# EAGLE board Waveshapers v2.2 for voice board v1.1.1 - v1.0 (EAGLE 9.6.2), part 1 of 2
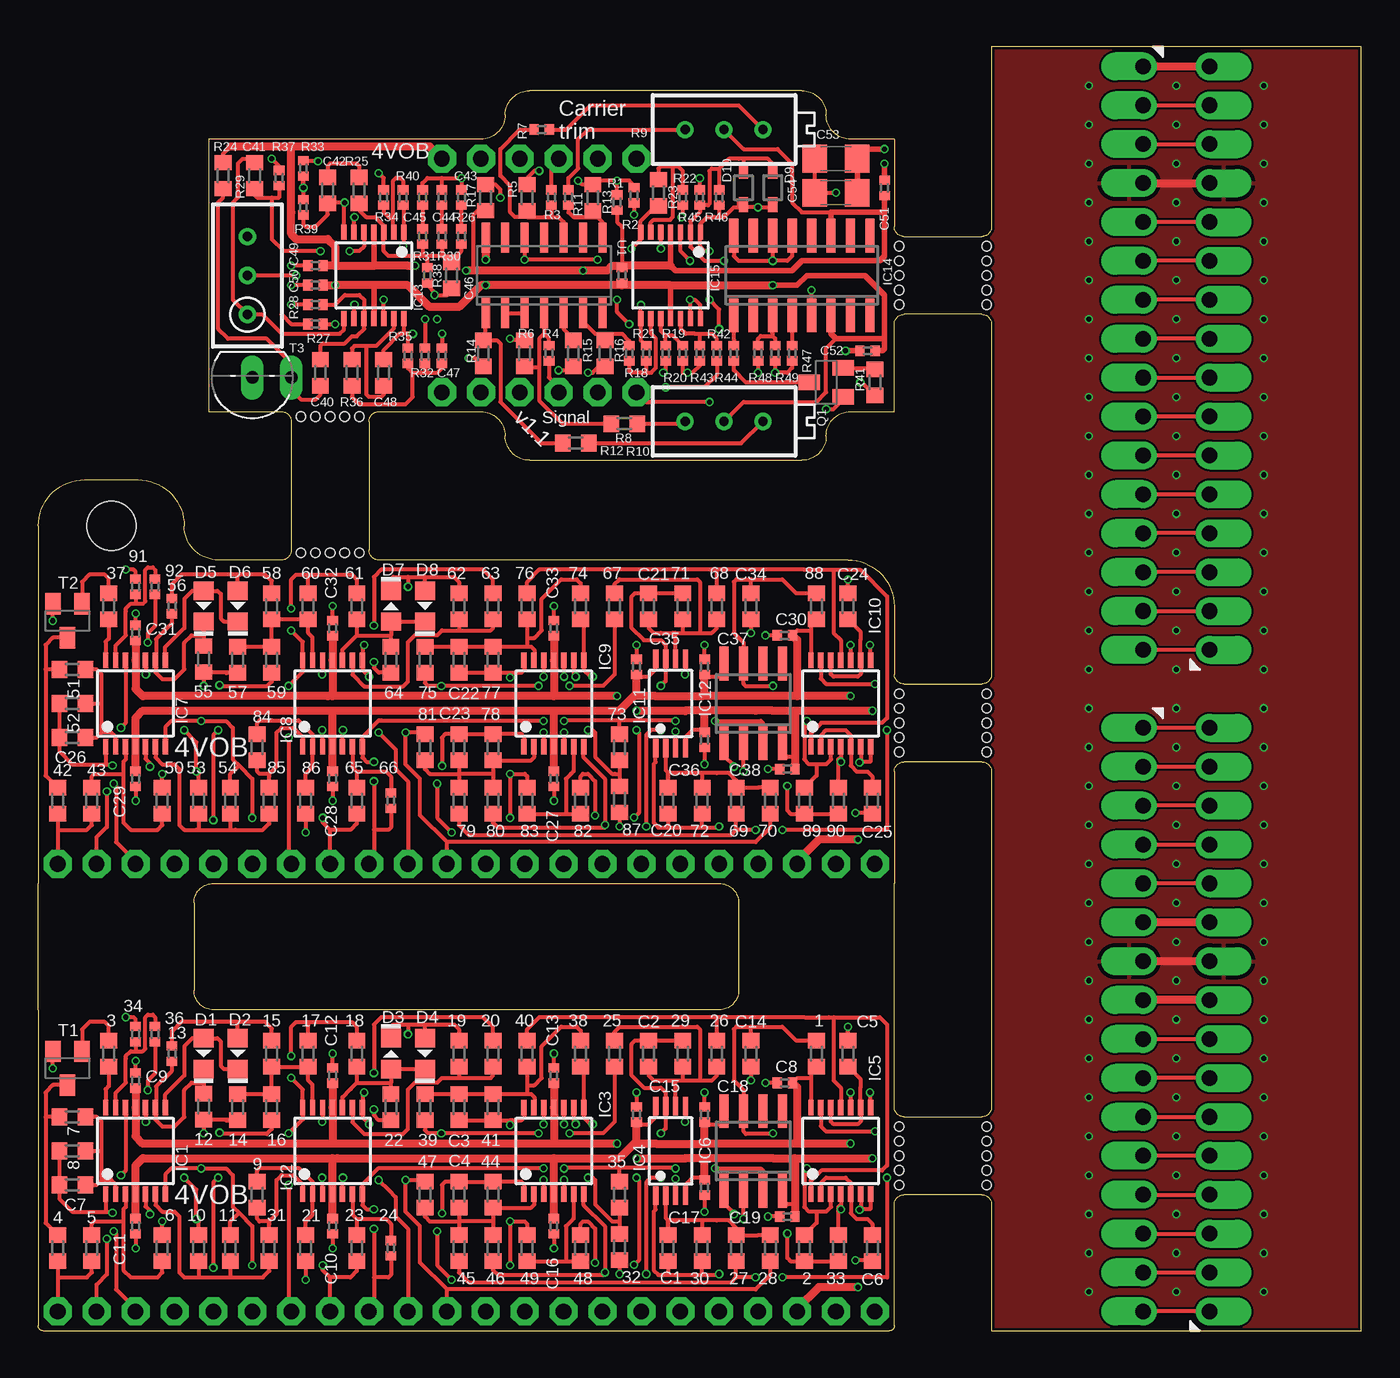
[diagram p0: board, top side]
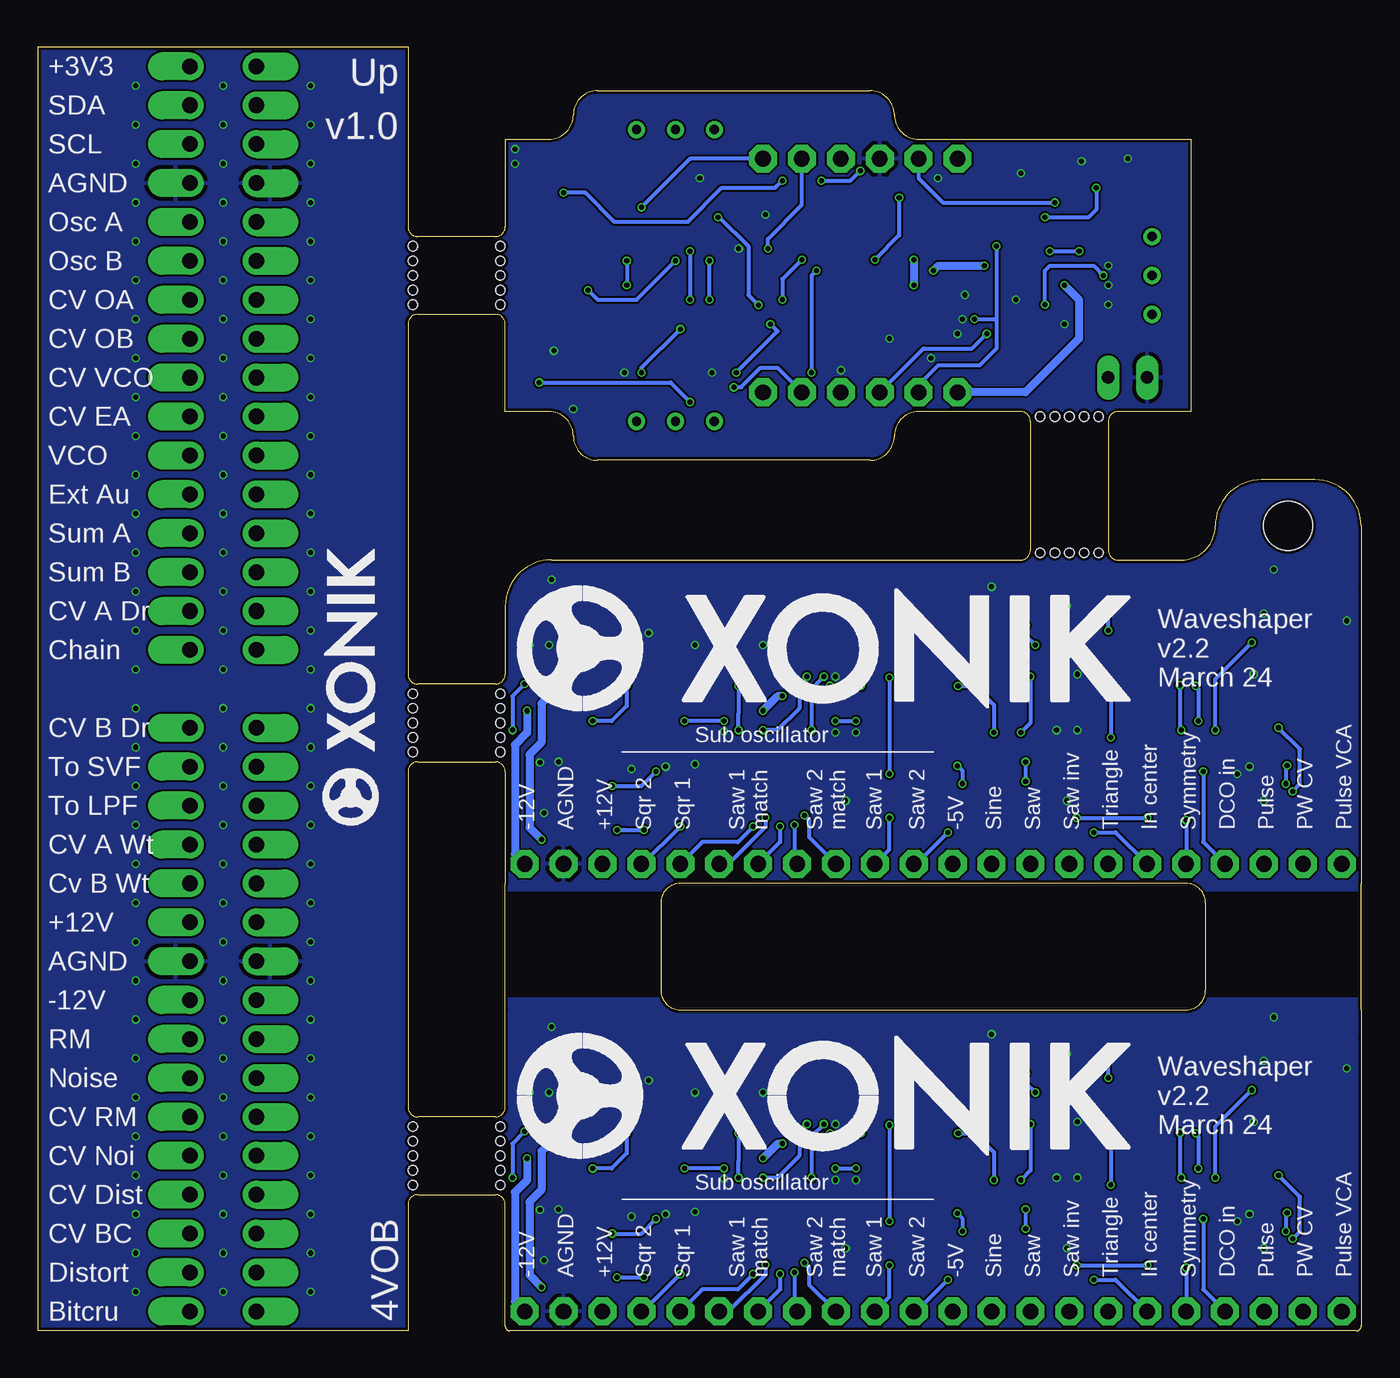
[diagram p1: board, bottom side, seen from below]

Size 86.36 x 83.82 mm. Coordinates in mm from the lower left corner, seen from the top.
Outline: 0,29.21 0,52.55 arc-90 3.02,55.56 6.51,55.56 arc-90 9.53,52.55 arc90 11.75,50.32 15.88,50.32 arc90 16.51,50.96 16.51,59.37 arc90 15.88,60.01 11.11,60.01 11.11,61.28 11.11,77.79 28.89,77.79 arc90 30.48,79.38 arc-90 32.07,80.96 49.85,80.96 arc-90 51.44,79.38 arc90 53.02,77.79 55.88,77.79 55.88,72.07 arc90 56.52,71.44 61.59,71.44 arc90 62.23,72.07 62.23,83.82 86.36,83.82 86.36,0 62.23,0 62.23,8.26 arc90 61.59,8.89 56.52,8.89 arc90 55.88,8.26 55.88,0.32 arc-90 55.56,0 0.32,0 arc-90 0,0.32 0,19.05 0,20.95 0,29.21
Outline: 0,48.26 0,29.21
Outline: 44.45,20.95 11.43,20.95 arc-90 10.16,22.23 10.16,27.94 arc-90 11.43,29.21 44.45,29.21 arc-90 45.72,27.94 45.72,22.23 arc-90 44.45,20.95
Outline: 55.88,20.95 55.88,29.21 55.88,36.51 arc-90 56.52,37.15 61.59,37.15 arc-90 62.23,36.51 62.23,14.61 arc-90 61.59,13.97 56.52,13.97 arc-90 55.88,14.61 55.88,20.95
Outline: 52.86,50.32 arc-90 55.88,47.31 55.88,42.86 arc90 56.52,42.23 61.59,42.23 arc90 62.23,42.86 62.23,65.72 arc90 61.59,66.36 56.52,66.36 arc90 55.88,65.72 55.88,60.01 53.02,60.01 arc90 51.44,58.42 arc-90 49.85,56.83 32.07,56.83 arc-90 30.48,58.42 arc90 28.89,60.01 22.23,60.01 arc90 21.59,59.37 21.59,50.96 arc90 22.23,50.32 52.86,50.32
Copper layers (1*16): Top 0.035mm / dielectric 1.6mm / Bottom 0.035mm
Design rules "jlcpcb-2layers *": minimum track width 5mil, minimum drill 0.3mm, track to track 5mil, track to pad 5mil, pad to pad 5mil, via to via 5mil, smd to smd 5mil, copper to edge 0.2mm, drill to drill 6mil, minimum pad ring 10mil, minimum via ring 4mil, stop-mask expansion 4mil, vias tented up to drill 0mil, thermal gap 10mil
Holes 3.2 mm at 4.76,52.55
Holes 0.6 mm at 17.14,59.69 18.1,59.69 19.05,59.69 20,59.69 20.95,59.69 17.14,50.8 18.1,50.8 19.05,50.8 20,50.8 20.95,50.8 56.2,66.99 56.2,67.94 56.2,68.9 56.2,69.85 56.2,70.8 61.91,70.8 61.91,69.85 61.91,68.9 61.91,67.94 61.91,66.99 61.91,13.34 61.91,12.38 61.91,11.43 61.91,10.48 61.91,9.53 56.2,9.53 56.2,10.48 56.2,11.43 56.2,12.38 56.2,13.34 61.91,41.59 61.91,40.64 61.91,39.69 61.91,38.73 61.91,37.78 56.2,37.78 56.2,38.73 56.2,39.69 56.2,40.64 56.2,41.59

## Footprints (pad centres in the part's own frame; a part is rotated, then mirrored left to right if it is on the bottom)
R0603 = smd 1 x 1.1: 1 -0.85,0; 2 0.85,0
R0402 = smd 0.6 x 0.7: 1 -0.5,0; 2 0.5,0
C0603-J = smd 1 x 1.1: 1 -0.85,0; 2 0.85,0
C0402-J = smd 0.6 x 0.7: 1 -0.5,0; 2 0.5,0
C1206 = smd 1.6 x 1.8: 1 -1.4,0; 2 1.4,0
D0805-J = smd 1.2 x 1.3: A 1,0; C -1,0
SOD323J = smd 1 x 0.6: 1 -1.1,0; 2 1.1,0
TSSOP14J = smd 0.35 x 1: 1 -1.95,-2.825; 2 -1.3,-2.825; 3 -0.65,-2.825; 4 0,-2.825; 5 0.65,-2.825; 6 1.3,-2.825; 7 1.95,-2.825; 8 1.95,2.825; 9 1.3,2.825; 10 0.65,2.825; 11 0,2.825; 12 -0.65,2.825; 13 -1.3,2.825; 14 -1.95,2.825
TSSOP8J = smd 1.2 x 0.35: 1 -2.925,0.975; 2 -2.925,0.325; 3 -2.925,-0.325; 4 -2.925,-0.975; 5 2.925,-0.975; 6 2.925,-0.325; 7 2.925,0.325; 8 2.925,0.975
SO08J = smd 0.6 x 2.2: 1 -1.905,-2.6; 2 -0.635,-2.6; 3 0.635,-2.6; 4 1.905,-2.6; 5 1.905,2.6; 6 0.635,2.6; 7 -0.635,2.6; 8 -1.905,2.6
SO16-NARROW-J = smd 0.6 x 2.2: 1 -4.445,-2.6; 2 -3.175,-2.6; 3 -1.905,-2.6; 4 -0.635,-2.6; 5 0.635,-2.6; 6 1.905,-2.6; 7 3.175,-2.6; 8 4.445,-2.6; 9 4.445,2.6; 10 3.175,2.6; 11 1.905,2.6; 12 0.635,2.6; 13 -0.635,2.6; 14 -1.905,2.6; 15 -3.175,2.6; 16 -4.445,2.6
SOT23-BEC = smd 1 x 1.4: B -0.95,-1.1; C 0,1.1; E 0.95,-1.1
RTRIM3296X = drill 0.61: 1 0,-2.54; 2 0,0; 3 0,2.54
RTRIM3296W = drill 0.61: 1 0,-2.54; 2 0,0; 3 0,2.54
NOISE-2N3904-J = drill 0.813 long: B 0,0; E -2.54,0
SOIC127P600X175-14N = smd 1.981 x 0.533: 1 -2.464,3.81; 2 -2.464,2.54; 3 -2.464,1.27; 4 -2.464,0; 5 -2.464,-1.27; 6 -2.464,-2.54; 7 -2.464,-3.81; 8 2.464,-3.81; 9 2.464,-2.54; 10 2.464,-1.27; 11 2.464,0; 12 2.464,1.27; 13 2.464,2.54; 14 2.464,3.81
SIP-PIN16-1J = drill 1.016 offset: 1 -19.05,0; 2 -16.51,0; 3 -13.97,0; 4 -11.43,0; 5 -8.89,0; 6 -6.35,0; 7 -3.81,0; 8 -1.27,0; 9 1.27,0; 10 3.81,0; 11 6.35,0; 12 8.89,0; 13 11.43,0; 14 13.97,0; 15 16.51,0; 16 19.05,0
MA22N-1J = drill 1.016 octagon: 1 -26.67,0; 2 -24.13,0; 3 -21.59,0; 4 -19.05,0; 5 -16.51,0; 6 -13.97,0; 7 -11.43,0; 8 -8.89,0; 9 -6.35,0; 10 -3.81,0; 11 -1.27,0; 12 1.27,0; 13 3.81,0; 14 6.35,0; 15 8.89,0; 16 11.43,0; 17 13.97,0; 18 16.51,0; 19 19.05,0; 20 21.59,0; 21 24.13,0; 22 26.67,0
MA06N-1J = drill 1.016 octagon: 1 -6.35,0; 2 -3.81,0; 3 -1.27,0; 4 1.27,0; 5 3.81,0; 6 6.35,0

## Placement (x,y rotation side)
1  510R  [R0603]  50.8,18.1 270 top
2  100k  [R0603]  50.01,5.4 270 top
3  68k  [R0603]  4.6,18.1 270 top
4  1k  [R0603]  1.27,5.4 270 top
5  200k  [R0603]  3.49,5.4 270 top
6  100k  [R0603]  8.1,5.4 90 top
7  100k  [R0603]  2.22,13.97 0 top
8  200k  [R0603]  2.22,11.75 180 top
9  30k  [R0603]  14.29,8.89 270 top
10  27k  [R0603]  10.48,5.4 270 top
11  27k  [R0603]  12.54,5.4 90 top
12  100k  [R0603]  10.79,14.64 90 top
13  100k  [R0402]  8.73,18.1 90 top
14  100k  [R0603]  13.02,14.61 90 top
15  50k  [R0603]  15.24,18.1 90 top
16  100k  [R0603]  15.24,14.61 270 top
17  200k  [R0603]  17.62,18.1 270 top
18  150k  [R0603]  20.8,18.1 90 top
19  1k2  [R0603]  27.46,18.1 90 top
20  15k  [R0603]  29.69,18.1 270 top
21  15k  [R0603]  17.46,5.4 90 top
22  22k  [R0603]  23.02,14.61 270 top
23  100k  [R0603]  20.8,5.4 90 top
24  100k  [R0402]  23.02,5.4 270 top
25  20k  [R0603]  37.62,18.1 90 top
26  24k  [R0603]  44.29,18.1 270 top
27  24k  [R0603]  45.56,5.4 90 top
28  20k  [R0603]  47.78,5.4 90 top
29  20k  [R0603]  42.07,18.1 90 top
30  20k  [R0603]  43.34,5.4 270 top
31  27k  [R0603]  15.08,5.4 270 top
32  33k  [R0603]  37.94,5.48 270 top
33  1k  [R0603]  52.23,5.4 90 top
34  100k  [R0402]  6.35,19.37 90 top
35  100k  [R0603]  37.94,8.89 270 top
36  100k  [R0402]  7.62,19.37 90 top
37  68k  [R0603]  4.6,47.31 270 top
38  49.9k  [R0603]  35.4,18.1 270 top
39  100k  [R0603]  25.24,14.61 270 top
40  120k  [R0603]  31.91,18.1 270 top
41  49.9k  [R0603]  29.69,14.61 270 top
42  1k  [R0603]  1.27,34.61 270 top
43  200k  [R0603]  3.49,34.61 270 top
44  49.9k  [R0603]  29.69,8.89 90 top
45  120k  [R0603]  27.46,5.4 270 top
46  49.9k  [R0603]  29.69,5.4 270 top
47  100k  [R0603]  25.24,8.89 90 top
48  33k  [R0603]  35.4,5.4 270 top
49  100k  [R0603]  31.91,5.4 270 top
50  100k  [R0603]  8.1,34.61 90 top
51  100k  [R0603]  2.22,43.18 0 top
52  200k  [R0603]  2.22,40.96 180 top
53  27k  [R0603]  10.48,34.61 270 top
54  27k  [R0603]  12.54,34.61 90 top
55  100k  [R0603]  10.79,43.85 90 top
56  100k  [R0402]  8.73,47.31 90 top
57  100k  [R0603]  13.02,43.81 90 top
58  50k  [R0603]  15.24,47.31 90 top
59  100k  [R0603]  15.24,43.81 270 top
60  200k  [R0603]  17.62,47.31 270 top
61  150k  [R0603]  20.8,47.31 90 top
62  1k2  [R0603]  27.46,47.31 90 top
63  15k  [R0603]  29.69,47.31 270 top
64  22k  [R0603]  23.02,43.81 270 top
65  100k  [R0603]  20.8,34.61 90 top
66  100k  [R0402]  23.02,34.61 270 top
67  20k  [R0603]  37.62,47.31 90 top
68  24k  [R0603]  44.29,47.31 270 top
69  24k  [R0603]  45.56,34.61 90 top
70  20k  [R0603]  47.78,34.61 90 top
71  20k  [R0603]  42.07,47.31 90 top
72  20k  [R0603]  43.34,34.61 270 top
73  100k  [R0603]  37.94,38.1 270 top
74  49.9k  [R0603]  35.4,47.31 270 top
75  100k  [R0603]  25.24,43.81 270 top
76  120k  [R0603]  31.91,47.31 270 top
77  49.9k  [R0603]  29.69,43.81 270 top
78  49.9k  [R0603]  29.69,38.1 90 top
79  120k  [R0603]  27.46,34.61 270 top
80  49.9k  [R0603]  29.69,34.61 270 top
81  100k  [R0603]  25.24,38.1 90 top
82  33k  [R0603]  35.4,34.61 270 top
83  100k  [R0603]  31.91,34.61 270 top
84  30k  [R0603]  14.29,38.1 270 top
85  27k  [R0603]  15.08,34.61 270 top
86  15k  [R0603]  17.46,34.61 90 top
87  33k  [R0603]  37.94,34.69 270 top
88  510R  [R0603]  50.8,47.31 270 top
89  100k  [R0603]  50.01,34.61 270 top
90  1k  [R0603]  52.23,34.61 90 top
91  100k  [R0402]  6.35,48.58 90 top
92  100k  [R0402]  7.62,48.58 90 top
C1  10pF  [C0603-J]  41.12,5.4 270 top
C2  10pF  [C0603-J]  39.85,18.1 90 top
C3  30pF  [C0603-J]  27.46,14.61 270 top
C4  30pF  [C0603-J]  27.46,8.89 90 top
C5  100nF  [C0603-J]  52.86,18.1 270 top
C6  100nF  [C0603-J]  54.45,5.4 90 top
C7  3pF  [C0603-J]  2.22,9.53 180 top
C8  1uF  [C0402-J]  48.74,16.19 0 top
C9  1uF  [C0402-J]  6.35,16.35 90 top
C10  1uF  [C0402-J]  19.21,6.83 90 top
C11  1uF  [C0402-J]  6.35,6.83 90 top
C12  1uF  [C0402-J]  19.21,16.67 90 top
C13  1uF  [C0402-J]  33.66,16.67 90 top
C14  820pF  [C0603-J]  46.51,18.1 90 top
C15  1uF  [C0402-J]  39.05,14.13 270 top
C16  1uF  [C0402-J]  33.66,6.83 90 top
C17  1uF  [C0402-J]  43.5,9.37 270 top
C18  1uF  [C0402-J]  43.5,14.13 270 top
C19  1uF  [C0402-J]  48.9,7.46 180 top
C20  10pF  [C0603-J]  41.12,34.61 270 top
C21  10pF  [C0603-J]  39.85,47.31 90 top
C22  30pF  [C0603-J]  27.46,43.81 270 top
C23  30pF  [C0603-J]  27.46,38.1 90 top
C24  100nF  [C0603-J]  52.86,47.31 270 top
C25  100nF  [C0603-J]  54.45,34.61 90 top
C26  3pF  [C0603-J]  2.22,38.73 180 top
C27  1uF  [C0402-J]  33.66,36.04 90 top
C28  1uF  [C0402-J]  19.21,36.04 90 top
C29  1uF  [C0402-J]  6.35,36.04 90 top
C30  1uF  [C0402-J]  48.74,45.4 0 top
C31  1uF  [C0402-J]  6.35,45.56 90 top
C32  1uF  [C0402-J]  19.21,45.88 90 top
C33  1uF  [C0402-J]  33.66,45.88 90 top
C34  820pF  [C0603-J]  46.51,47.31 90 top
C35  1uF  [C0402-J]  39.05,43.34 270 top
C36  1uF  [C0402-J]  43.5,38.58 270 top
C37  1uF  [C0402-J]  43.5,43.34 270 top
C38  1uF  [C0402-J]  48.9,36.67 180 top
C39  1uF  [C0402-J]  38.1,68.9 90 top
C40  470n  [C0603-J]  18.41,62.55 90 top
C41  470n  [C0603-J]  14.13,75.41 270 top
C42  470n  [C0603-J]  18.89,74.45 90 top
C43  100n  [C0402-J]  27.62,73.98 270 top
C44  22n  [C0402-J]  26.35,73.98 270 top
C45  10n  [C0402-J]  25.08,73.98 270 top
C46  3n3  [C0603-J]  26.99,68.9 90 top
C47  220n  [C0402-J]  26.35,63.66 270 top
C48  2n2  [C0603-J]  22.54,62.55 270 top
C49  1uF  [C0402-J]  18.1,69.53 0 top
C50  1uF  [C0402-J]  18.1,68.26 180 top
C51  1uF  [C0402-J]  55.24,74.61 90 top
C52  1uF  [C0402-J]  54.13,63.98 0 top
C53  47uF  [C1206]  52.07,76.52 0 top
C54  47uF  [C1206]  52.07,74.3 0 top
D1  1N41480805  [D0805-J]  10.79,18.1 90 top
D2  1N41480805  [D0805-J]  13.02,18.1 90 top
D3  1N41480805  [D0805-J]  23.02,18.1 270 top
D4  1N41480805  [D0805-J]  25.24,18.1 90 top
D5  1N41480805  [D0805-J]  10.79,47.31 90 top
D6  1N41480805  [D0805-J]  13.02,47.31 90 top
D7  1N41480805  [D0805-J]  23.02,47.31 270 top
D8  1N41480805  [D0805-J]  25.24,47.31 90 top
D9  1N4148  [SOD323J]  47.94,74.61 90 top
D10  1N4148  [SOD323J]  46.04,74.61 270 top
IC1  TL074JT  [TSSOP14J]  6.35,11.75 0 top
IC2  TL074JT  [TSSOP14J]  19.21,11.75 0 top
IC3  TL074JT  [TSSOP14J]  33.66,11.75 0 top
IC4  TL072JT  [TSSOP8J]  41.27,11.75 90 top
IC5  4013T  [TSSOP14J]  52.39,11.75 0 top
IC6  LM311D  [SO08J]  46.67,11.75 0 top
IC7  TL074JT  [TSSOP14J]  6.35,40.96 0 top
IC8  TL074JT  [TSSOP14J]  19.21,40.96 0 top
IC9  TL074JT  [TSSOP14J]  33.66,40.96 0 top
IC10  4013T  [TSSOP14J]  52.39,40.96 0 top
IC11  TL072JT  [TSSOP8J]  41.27,40.96 90 top
IC12  LM311D  [SO08J]  46.67,40.96 0 top
IC13  TL074JT  [TSSOP14J]  21.91,68.9 180 top
IC14  LM13700SL  [SO16-NARROW-J]  49.85,68.9 0 top
IC15  TL074JT  [TSSOP14J]  41.27,68.9 180 top
Q1  MMBT3906  [SOT23-BEC]  51.44,61.91 90 top
R1  1k5  [R0402]  37.78,73.66 270 top
R2  1k5  [R0402]  38.89,74.14 90 top
R3  180k  [R0402]  33.5,73.98 270 top
R4  180k  [R0402]  33.34,63.82 90 top
R5  2k7  [R0603]  31.91,73.98 90 top
R6  2k7  [R0603]  31.75,63.82 270 top
R7  12k  [R0402]  32.86,78.42 0 top
R8  6k8  [R0603]  38.26,59.21 180 top
R9  500R  [RTRIM3296X]  44.77,78.42 270 top
R10  500R  [RTRIM3296X]  44.77,59.37 270 top
R11  12k  [R0402]  34.61,73.98 90 top
R12  6k8  [R0603]  35.08,57.94 180 top
R13  2k7  [R0603]  36.2,73.98 90 top
R14  2k7  [R0603]  29.05,63.82 90 top
R15  6k8  [R0603]  34.92,63.82 90 top
R16  1k2  [R0603]  36.99,63.82 270 top
R17  1k2  [R0603]  29.21,73.98 90 top
R18  15k  [R0402]  38.58,63.82 90 top
R19  15k  [R0402]  40.96,63.82 270 top
R20  15k  [R0402]  42.07,63.82 270 top
R21  15k  [R0402]  39.69,63.82 90 top
R22  10k  [R0402]  42.07,73.98 90 top
R23  68k  [R0603]  40.48,74.3 270 top
R24  220k  [R0603]  12.06,75.41 90 top
R25  68k  [R0603]  20.95,74.45 90 top
R26  33k  [R0402]  27.62,71.44 90 top
R27  1k  [R0402]  18.1,65.72 0 top
R28  100k  [R0402]  18.1,66.99 180 top
R29  200k  [RTRIM3296W]  13.65,68.9 0 top
R30  10k  [R0402]  26.35,71.44 90 top
R31  3k3  [R0402]  25.08,71.44 90 top
R32  4k7  [R0402]  25.24,63.66 270 top
R33  1k  [R0402]  17.3,75.88 270 top
R34  1k  [R0402]  22.54,73.98 270 top
R35  15k  [R0402]  24.13,63.66 90 top
R36  300k  [R0603]  20.48,62.55 90 top
R37  100k  [R0402]  15.72,75.25 270 top
R38  1M  [R0402]  25.4,68.9 270 top
R39  20k  [R0402]  17.3,73.34 270 top
R40  20k  [R0402]  23.81,73.98 270 top
R41  8k2  [R0603]  54.61,61.91 270 top
R42  33k  [R0402]  44.29,63.82 90 top
R43  1k  [R0402]  43.18,63.82 270 top
R44  10k  [R0402]  45.4,63.82 270 top
R45  1k  [R0402]  43.18,73.98 270 top
R46  33k  [R0402]  44.45,73.98 270 top
R47  510R  [R0402]  49.21,63.82 90 top
R48  15k  [R0402]  46.99,63.82 90 top
R49  510R  [R0402]  48.1,63.82 90 top
T1  2n3904  [SOT23-BEC]  1.91,17.14 180 top
T2  2n3904  [SOT23-BEC]  1.91,46.35 180 top
T3  NOISE-2N3904-DNM  [NOISE-2N3904-J]  13.97,62.23 180 top
U1  MC1496DR2G  [SOIC127P600X175-14N]  33.02,68.9 90 top
U$1  [XONIK_LOGO_40]  55.09,11.27 0 bottom
U$2  [XONIK_LOGO_40]  55.09,40.48 0 bottom
U$3  MA16-1JP-ANGLED  [SIP-PIN16-1J]  72.12,20.32 270 top
U$4  MA16-1JP-ANGLED  [SIP-PIN16-1J]  72.12,63.5 270 top
U$5  MA16-1JP-ANGLED  [SIP-PIN16-1J]  76.47,20.32 90 top
U$6  MA16-1JP-ANGLED  [SIP-PIN16-1J]  76.47,63.5 90 top
U$7  [XONIK_LOGO_18]  64.14,33.02 90 bottom
X1  [MA22N-1J]  27.94,1.27 0 top
X2  [MA22N-1J]  27.94,30.48 0 top
X3  MA06-1JN-DNM  [MA06N-1J]  32.7,61.28 0 top
X4  MA06-1JN-DNM  [MA06N-1J]  32.7,76.52 180 top

## Library data of the parts
1-92 R1-R8 R11-R28 R30-R49 = rcl; SPICEPREFIX: R
C1-C52 D1-D10 IC1-IC15 T3 U$1-U$7 X1-X4 = joakim
C53 C54 = rcl; SPICEPREFIX: C
Q1 = transistor-pnp
R9 R10 R29 = rcl; SPICEMODEL: X; SPICEPREFIXL: POT
T1 T2 = transistor-neu-to92
U1 = ON Semiconductor_By_element14_Batch_1; MPN: MC1496DR2G; OC_FARNELL: 1651904; OC_NEWARK: 45J1148; PACKAGE: SOIC-14; SUPPLIER: ON SEMICONDUCTOR

## Nets
+12V: 1.2 C8.2 C10.2 C11.2 C15.2 C16.2 C18.2 IC1.4 IC2.4 IC3.4 IC4.8 IC5.14 IC6.8 X1.20
+12V1: 88.2 C27.2 C28.2 C29.2 C30.2 C35.2 C37.2 IC7.4 IC8.4 IC9.4 IC10.14 IC11.8 IC12.8 X2.20
+12V2: C39.2 C49.2 C51.1 IC13.4 IC14.11 IC15.4 R1.2 R9.2 R16.2 R17.1 R24.2 X4.6
-5V: 25.1 28.1 39.2 47.2 X1.11
-5V1: 67.1 70.1 75.2 81.2 X2.11
-12V: C9.1 C12.1 C13.1 C17.1 C19.1 IC1.11 IC2.11 IC3.11 IC4.4 IC6.4 X1.22
-12V1: C31.1 C32.1 C33.1 C36.1 C38.1 IC7.11 IC8.11 IC9.11 IC11.4 IC12.4 X2.22
-12V2: C39.1 C50.1 C52.2 IC13.11 IC14.6 IC14.13 IC14.14 IC14.16 IC15.11 R10.2 U1.14 X3.1
AGND: U$3.7 U$4.4 U$5.10 U$6.13
AMP_CV: 4.2 5.2 X1.1
AMP_CV1: 42.2 43.2 X2.1
CAR_TRIM_1: R7.2 R9.3
CAR_TRIM_2: R9.1 R11.2
CARRIER: R3.1 X4.3
CARRIER_IN: R3.2 R5.1 R7.1 U1.10
COUT1: R17.2 R19.2 U1.12
COUT2: R16.1 R18.2 U1.6
DCO_IN: 10.1 36.1 X1.4
DCO_IN1: 53.1 92.1 X2.4
DIST_CV: R41.2 X3.6
DIST_I_ABC: IC14.1 R44.1
DIST_IN: R42.1 X3.5
DIST_OUT: D9.1 D10.2 IC15.1 R46.2 R48.1 X4.1
GND: 6.2 19.2 22.2 33.2 34.2 C5.1 C6.1 C8.1 C9.2 C10.1 C11.1 C12.2 C13.2 C14.1 C15.1 C16.1 C17.2 C18.1 C19.2 D3.C D4.A IC1.5 IC1.10 IC2.3 IC2.5 IC2.12 IC3.3 IC3.5 IC3.10 IC3.12 IC4.3 IC4.5 IC5.4 IC5.6 IC5.7 IC5.8 IC5.10 IC6.1 T1.E X1.21
GND1: 50.2 62.2 64.2 90.2 91.2 C24.1 C25.1 C27.1 C28.1 C29.1 C30.1 C31.2 C32.2 C33.2 C34.1 C35.1 C36.2 C37.1 C38.2 D7.C D8.A IC7.5 IC7.10 IC8.3 IC8.5 IC8.12 IC9.3 IC9.5 IC9.10 IC9.12 IC10.4 IC10.6 IC10.7 IC10.8 IC10.10 IC11.3 IC11.5 IC12.1 T2.E X2.21
GND2: C43.1 C44.1 C45.1 C46.1 C47.1 C49.1 C50.2 C51.2 C52.1 C53.2 C54.2 IC13.12 IC15.5 Q1.B R2.1 R6.1 R14.1 R15.1 R20.2 R27.2 R28.2 R33.1 R34.1 R37.1 R38.2 R43.2 R45.1 R47.1 R49.1 T3.B X4.4
IN_CENTER: 21.1 X1.6
IN_CENTER1: 86.1 X2.6
INV_SAW: 11.2 12.1 14.1 23.1 IC1.7 X1.8
INV_SAW1: 54.2 55.1 57.1 65.1 IC7.7 X2.8
LEV1: IC13.9 R27.1 R29.2
LEV2: C41.1 IC13.8 R29.1
N$1: 9.1 21.2 IC2.2
N$2: 3.2 IC1.14
N$3: 3.1 T1.B
N$4: 4.1 7.1 T1.C
N$5: 5.1 6.1 IC1.3
N$6: 7.2 8.1 C7.1 IC1.2
N$7: 37.2 IC7.14
N$8: 34.1 36.2 IC1.13
N$9: 37.1 T2.B
N$10: 10.2 11.1 31.2 IC1.6
N$11: 12.2 13.1 D1.C IC1.9
N$12: D1.A D2.C IC1.8
N$13: 13.2 15.2 D2.A
N$14: 14.2 15.1 16.1 17.2 IC2.13
N$15: 23.2 24.1 IC2.6
N$16: 42.1 51.1 T2.C
N$17: 43.1 50.1 IC7.3
N$18: 51.2 52.1 C26.1 IC7.2
N$19: 25.2 26.2 29.1 C2.1 IC4.6
N$20: 53.2 54.1 85.2 IC7.6
N$21: 48.2 49.2 IC3.6
N$22: 27.2 28.2 30.1 C1.1 IC4.2
N$23: 55.2 56.1 D5.C IC7.9
N$24: 32.1 35.2 IC3.9
N$25: 2.2 33.1 IC6.2
N$26: 38.1 39.1 40.2 41.1 C3.1 IC3.13
N$27: D5.A D6.C IC7.8
N$28: 56.2 58.2 D6.A
N$29: 44.1 45.1 46.1 47.1 C4.1 IC3.2
N$30: 57.2 58.1 59.1 60.2 IC8.13
N$31: C6.2 IC5.2 IC5.5
N$32: 26.1 40.1 IC5.1 IC5.11
N$33: 65.2 66.1 IC8.6
N$34: C5.2 IC5.9 IC5.12
N$35: 27.1 45.2 IC5.13
N$36: 19.1 20.2 IC2.9
N$37: 67.2 68.2 71.1 C21.1 IC11.6
N$38: 69.2 70.2 72.1 C20.1 IC11.2
N$39: 18.1 22.1 D3.A D4.C IC2.10
N$40: 73.2 87.1 IC9.9
N$41: 74.1 75.1 76.2 77.1 C22.1 IC9.13
N$42: 9.2 31.1 IC2.1
N$43: 82.2 83.2 IC9.6
N$44: 78.1 79.1 80.1 81.1 C23.1 IC9.2
N$45: C25.2 IC10.2 IC10.5
N$46: 68.1 76.1 IC10.1 IC10.11
N$47: C24.2 IC10.9 IC10.12
N$48: 69.1 79.2 IC10.13
N$49: 61.1 64.1 D7.A D8.C IC8.10
N$50: 62.1 63.2 IC8.9
N$51: 84.1 86.2 IC8.2
N$52: 84.2 85.1 IC8.1
N$53: 89.2 90.1 IC12.2
N$54: 91.1 92.2 IC7.13
N$55: U$3.1 U$5.16
N$56: U$3.2 U$5.15
N$57: U$3.3 U$5.14
N$58: U$3.4 U$5.13
N$59: U$3.5 U$5.12
N$60: U$3.6 U$5.11
N$61: U$3.8 U$5.9
N$62: U$3.9 U$5.8
N$63: U$3.10 U$5.7
N$64: U$3.11 U$5.6
N$65: U$3.12 U$5.5
N$66: U$3.13 U$5.4
N$67: U$3.14 U$5.3
N$68: U$3.15 U$5.2
N$69: U$3.16 U$5.1
N$70: U$4.16 U$6.1
N$71: U$4.15 U$6.2
N$72: U$4.14 U$6.3
N$73: U$4.13 U$6.4
N$74: U$4.12 U$6.5
N$75: U$4.11 U$6.6
N$76: U$4.10 U$6.7
N$77: U$4.9 U$6.8
N$78: U$4.8 U$6.9
N$79: U$4.7 U$6.10
N$80: U$4.6 U$6.11
N$81: U$4.5 U$6.12
N$82: U$4.3 U$6.14
N$83: U$4.2 U$6.15
N$84: U$4.1 U$6.16
N$85: R12.2 R14.2 U1.1
N$86: R11.1 R13.1 U1.8
N$87: C53.1 C54.1 R1.1 R2.2 R5.2 R13.2
N$88: R15.2 U1.5
N$89: U1.2 U1.3
N$90: IC15.10 R19.1 R20.1
N$91: IC15.9 R18.1 R21.1
N$92: IC15.8 R21.2 R22.1
N$93: IC15.6 R22.2 R23.1
N$94: IC13.6 R33.2 R39.1
N$95: IC13.2 R34.2 R40.1
N$96: C43.2 R26.2
N$97: C44.2 R30.2
N$98: C45.2 R31.2
N$99: C40.1 R24.1 T3.E
N$100: C40.2 IC13.10 R28.1
N$101: C41.2 IC13.5 R37.2
N$102: C46.2 IC13.3 R25.1 R26.1 R30.1 R31.1 R38.1
N$103: C42.2 R25.2
N$104: C47.2 R32.2 R35.1 R36.1
N$105: C48.2 IC13.13 R36.2
N$106: IC15.12 R42.2 R43.1
N$107: D9.2 D10.1 IC14.5 IC15.2 R45.2 R46.1
N$108: IC14.4 R47.2
N$109: IC14.3 R48.2 R49.2
N$110: Q1.E R41.1
N$111: Q1.C R44.2
N$112: IC15.3 IC15.13 IC15.14
OUT: IC15.7 R23.2 X4.2
PINK: IC13.1 R32.1 R40.2 X3.2
PULSE: 8.2 C7.2 IC1.1 X1.3
PULSE1: 52.2 C26.2 IC7.1 X2.3
PW_CV: IC1.12 X1.2
PW_CV1: IC7.12 X2.2
RED: C48.1 IC13.14 R35.2 X3.3
SAW: 24.2 35.1 IC2.7 IC6.3 X1.9
SAW1: 66.2 73.1 IC8.7 IC12.3 X2.9
SIG_IN: R4.2 R6.2 R8.2 U1.4
SIG_TRIM_1: R8.1 R10.1
SIG_TRIM_2: R10.3 R12.1
SIGNAL: R4.1 X3.4
SINE: 20.1 IC2.8 X1.10
SINE1: 63.1 IC8.8 X2.10
SQR: 1.1 2.1 C14.2 IC5.3 IC6.7
SQR1: 88.1 89.1 C34.2 IC10.3 IC12.7
SS1_TRIM_L: 32.2 X1.16
SS1_TRIM_L1: 87.2 X2.16
SS1_TRIM_R: 38.2 IC3.8 X1.17
SS1_TRIM_R1: 74.2 IC9.8 X2.17
SS2_TRIM_L: 48.1 X1.14
SS2_TRIM_L1: 82.1 X2.14
SS2_TRIM_R: 46.2 IC3.7 X1.15
SS2_TRIM_R1: 80.2 IC9.7 X2.15
SUB_SAW_1: 41.2 49.1 C3.2 IC3.14 X1.13
SUB_SAW_2: 44.2 C4.2 IC3.1 X1.12
SUB_SAW_3: 77.2 83.1 C22.2 IC9.14 X2.13
SUB_SAW_4: 78.2 C23.2 IC9.1 X2.12
SUB_SQR_1: 29.2 C2.2 IC4.7 X1.18
SUB_SQR_2: 30.2 C1.2 IC4.1 X1.19
SUB_SQR_3: 71.2 C21.2 IC11.7 X2.18
SUB_SQR_4: 72.2 C20.2 IC11.1 X2.19
SYMMETRY: 16.2 X1.5
SYMMETRY1: 59.2 X2.5
TRIANGLE: 17.1 18.2 IC2.14 X1.7
TRIANGLE1: 60.1 61.2 IC8.14 X2.7
WHITE: C42.1 IC13.7 R39.2 X4.5